# Altium PCB Gym_rep_counter.PcbDoc
Units mm, origin at the board's own origin, x right, y up, seen from the top; angles counter-clockwise.
Board outline 44.6 x 30.6 mm, 2 copper layers (Top Layer, Bottom Layer); 19 components, 19 nets, 90 pads, 14 vias.
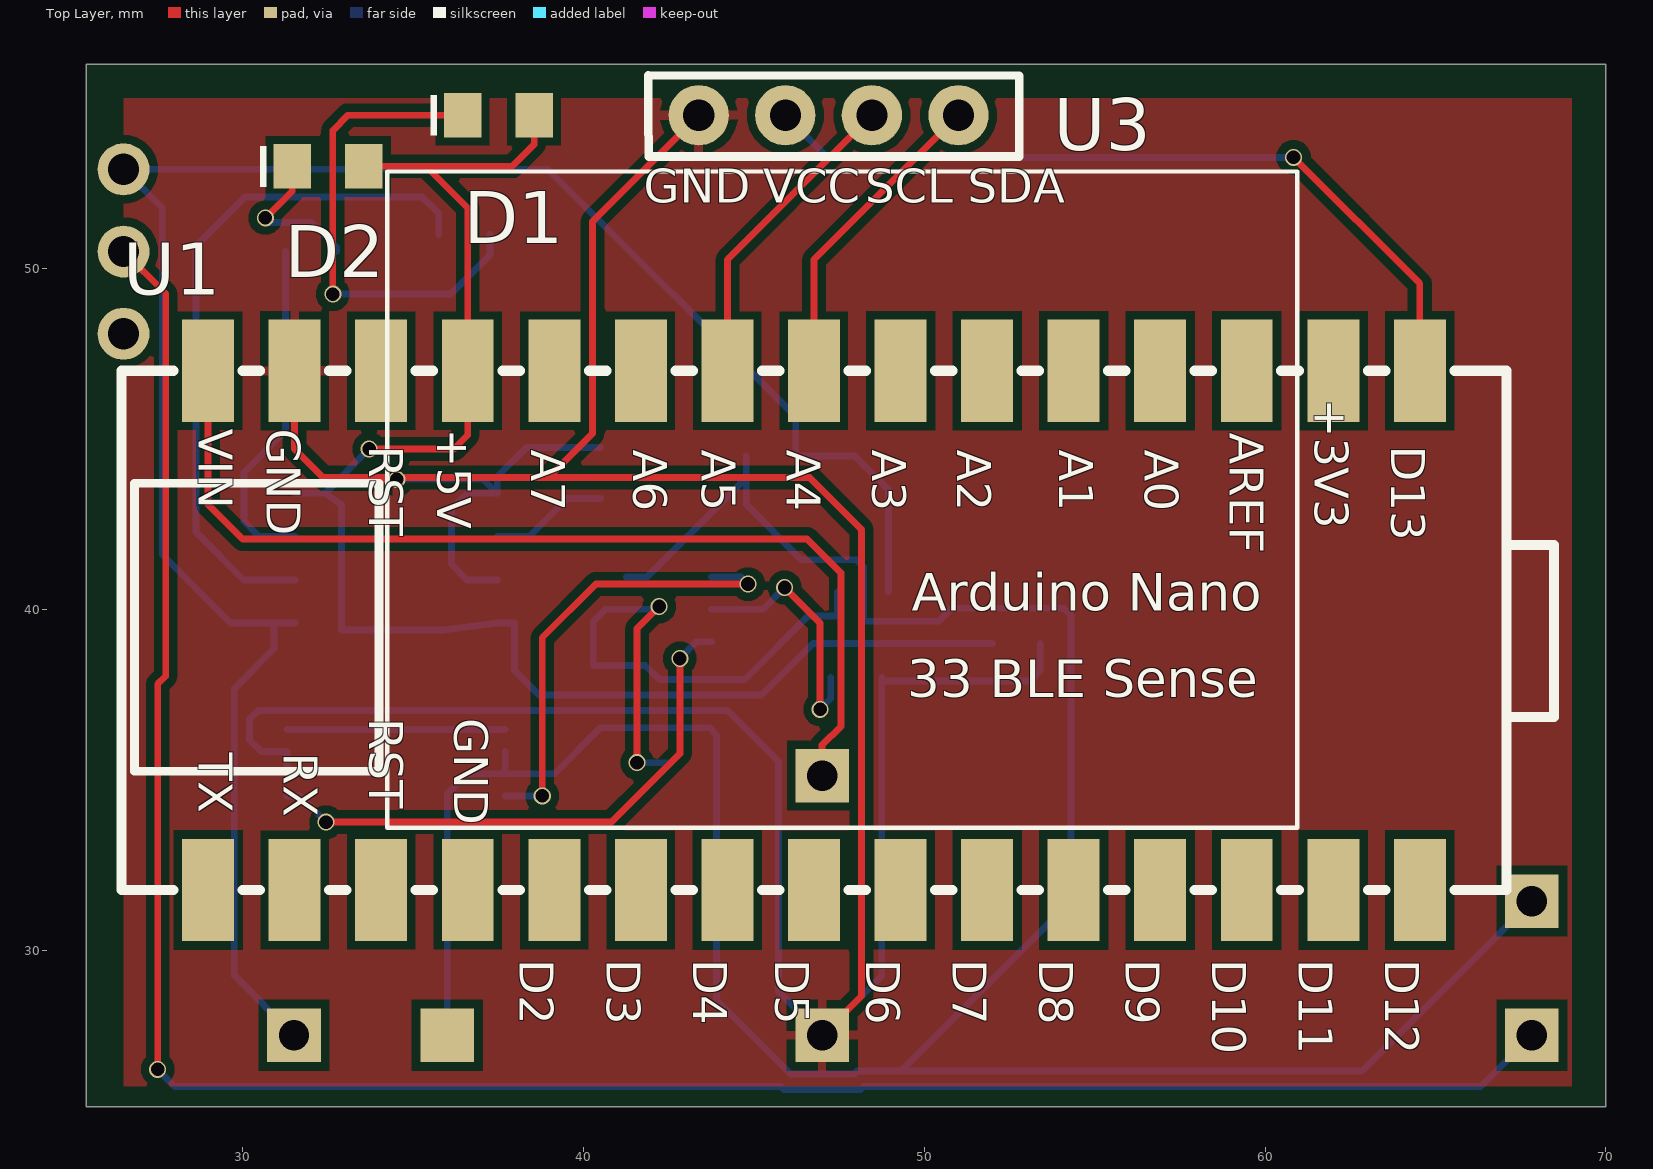
[diagram p0: Top Layer view]
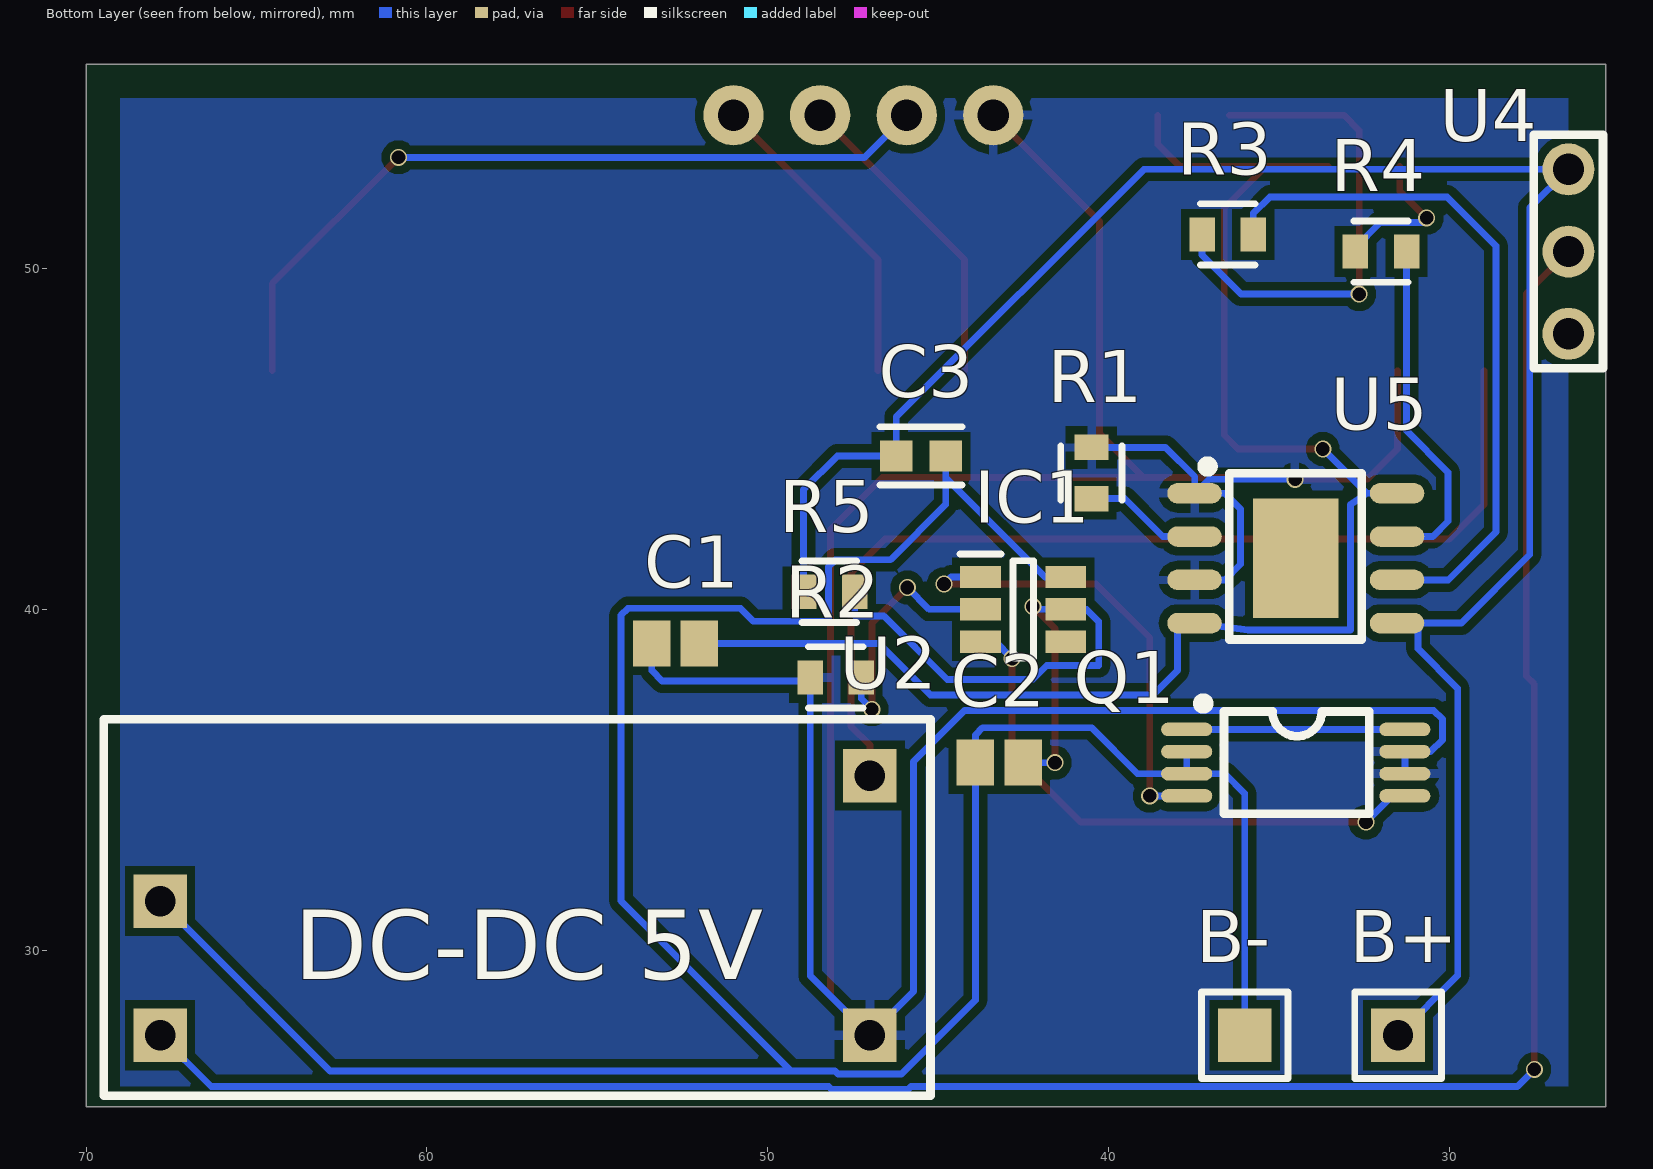
[diagram p1: Bottom Layer view, seen from below]

## Layer stack, top to bottom
Top Solder: solder mask 0.0102, Solder Resist, Dk 3.5
Top Layer: signal copper 0.0356
Dielectric 1: dielectric 0.32, FR-4, Dk 4.8
Bottom Layer: signal copper 0.0356
Bottom Solder: solder mask 0.0102, Solder Resist, Dk 3.5

## Board outline
25.4,25.4 70,25.4 70,56 25.4,56

## Design rules (kind name [scope] priority, off if disabled: settings)
Clearance [All] p1: gap=0.25 ignorepadtopadclearanceinfootprint=FALSE
PolygonConnect [All] p1: connectstyle=Relief reliefconductorwidth=0.254 reliefentries=4 polygonreliefangle="90 Angle" airgapwidth=0.254
RoutingVias [All] p1: holewidth=0.4 width=0.5 viastyle="Through Hole" minholewidth=0.4 minwidth=0.5 maxholewidth=0.4 maxwidth=0.5
SolderMaskExpansion [All] p1: expansion=0.102 istentingtop=FALSE
SupplyNets "Schematic Supply Nets" [InNet('GND')] p1: voltage=0.000
Width [All] p1: maxlimit=0.2 minlimit=0.1 preferedwidth=0.2
30 further rules are at their usual default settings.

## Components (designator, comment, footprint, x,y, rotation, side; value= is the part's Value field where it differs from the comment)
B+ "Header-Male-2.54_1x1" Battery_connector#1 31.5,27.5 r180 bottom
B- "Header-Male-2.54_1x1" Battery_connector#2 36,27.5 r180 bottom
C1 "100nF" CAPC2013X88X50LL20T25 52.7,39 r180 bottom
C2 "100nF" CAPC2013X88X50LL20T25 43.2,35.5 r180 bottom
C3 "10uF" FP-GRM188-0_1-e0_2_0_5-IPC_B 45.5,44.5 r180 bottom
D1 "green" WL-SMCW_0805_150080xx75000 37.5,54.5 r0 top
D2 "Red" WL-SMCW_0805_150080xx75000 32.5,53 r0 top
IC1 "DW01A-G" SOT95P280X135-6N 42.5,40 r180 bottom
Q1 "FS8205A" TSSOP-8_L4.4-W3.5-P0.65-LS6.4-BL 34.5,35.5 r270 bottom
R1 "1.2K" FP-CRCW0603-HPe3-MFG 40.5,44 r270 bottom
R2 "1K" FP-CRCW0603-HPe3-MFG 48,38 r180 bottom
R3 "1K" FP-CRCW0603-HPe3-MFG 36.5,51 r180 bottom
R4 "1K" FP-CRCW0603-HPe3-MFG 32,50.5 r180 bottom
R5 "100Ω" FP-CRCW0603-HPe3-MFG 48.193,40.515 r180 bottom
U1 "Arduino Nano 33 BLE Sense" arduino_nano_33 46.76,39.38 r270 top
U2 "Boost_Convertor" BOOST_CONVERTER 69.479,25.722 r180 bottom
U3 "OLED_display" OLED_DISPLAY 47.063,53.23 r0 top
U4 "Switch" SWITCH 26.5,52.913 r270 bottom
U5 "TP4056" TP4056 34.5,41.5 r180 bottom

## Footprints (in the part's own frame and the unit in brackets; to place one, negate y for a bottom-side part, rotate by r counter-clockwise, add the part's x,y. Pads: shape width x height; smd on the part's side, far side on the other; paste and mask are expansions set on the pad)
arduino_nano_33 [mil]
  rect 118.11x60 smd paste+0 mask+2: 1(-300,700) 2(-300,600) 3(-300,500) 4(-300,400) 5(-300,300) 6(-300,200) 7(-300,100) 8(-300,0) 9(-300,-100) 10(-300,-200) 11(-300,-300) 12(-300,-400) 13(-300,-500) 14(-300,-600) 15(-300,-700) 16(300,-700) 17(300,-600) 18(300,-500) 19(300,-400) 20(300,-300) 21(300,-200) 22(300,-100) 23(300,0) 24(300,100) 25(300,200) 26(300,300) 27(300,400) 28(300,500) 29(300,600) 30(300,700)
  silkscreen extent -300,-800 300,855
Battery_connector#1 [mil]
  rect 62x62 hole 35 paste-99999 mask+2: 1(0,0)
  silkscreen extent -50,-50 50,50
Battery_connector#2 [mil]
  rect 62x62 all layers, no hole paste-99999 mask+2: 1(0,0)
  silkscreen extent -50,-50 50,50
BOOST_CONVERTER [mil]
  rect 62x62 hole 35 paste-99999 mask+4: 1(65,225) 2(65,70) 3(885,370) 4(885,70)
  silkscreen extent 0,0 955,435
CAPC2013X88X50LL20T25 [mm] "Chip Capacitor, 2-Leads, Body 2.00x1.25mm, IPC High Density"
  rect 1.1x1.35 smd: 1(-0.7,0) 2(0.7,0)
  body extent -1.1,-0.72 1.1,0.72, height 0.88
FP-CRCW0603-HPe3-MFG [mm]
  rect 0.75x1 smd paste+0 mask+0: 1(-0.75,0) 2(0.75,0)
  silkscreen extent -0.8,-0.9 0.8,0.9, body extent -0.8,-0.43 0.8,0.43, height 0.55
FP-GRM188-0_1-e0_2_0_5-IPC_B [mm]
  rect 0.959x0.912 smd paste+0 mask+0: 1(-0.727,0) 2(0.727,0)
  silkscreen extent -1.21,-0.86 1.21,0.86, body extent -0.8,-0.4 0.8,0.4, height 0.9
OLED_DISPLAY [mil]
  round 69.69 hole 36 paste-99999 mask+4: 1(-145,50) 1(-145,50) 2(-45,50) 2(-45,50) 3(55,50) 3(55,50) 4(155,50) 4(155,50)
  silkscreen extent -505,-773 546,96
SOT95P280X135-6N [mm]
  rect 1.2x0.65 smd: 1(-1.25,0.95) 2(-1.25,0) 3(-1.25,-0.95) 4(1.25,-0.95) 5(1.25,0) 6(1.25,0.95)
  silkscreen extent -1.85,-1.43 0.3,1.63
SWITCH [mil]
  round 60 hole 36 paste-99999 mask+2: 1(0,0) 2(95,0) 3(190,0)
  silkscreen extent -40,-40 230,40
TP4056 [mm]
  oval 1.6x0.6 smd paste+0 mask+0.051: 1(-2.972,1.905) 2(-2.972,0.635) 3(-2.972,-0.635) 4(-2.972,-1.905) 5(2.972,-1.905) 6(2.972,-0.635) 7(2.972,0.635) 8(2.972,1.905)
  rect 2.5x3.5 smd paste+0 mask+0.051: 9(0,0)
  silkscreen extent -2.74,-2.39 1.93,2.84
TSSOP-8_L4.4-W3.5-P0.65-LS6.4-BL [mm]
  oval 0.4x1.5 smd paste+0 mask+0.051: 1(-0.975,-3.2) 2(-0.325,-3.2) 3(0.325,-3.2) 4(0.975,-3.2) 5(0.975,3.2) 6(0.325,3.2) 7(-0.325,3.2) 8(-0.975,3.2)
  silkscreen extent -1.89,-2.87 1.5,2.16
WL-SMCW_0805_150080xx75000 [mm] "SMD Mono-color Chip LED, body 2.0x1.25mm"
  rect 1.1x1.3 smd: 1(-1.05,0) 2(1.05,0)
  silkscreen extent -2,-0.6 -1.8,0.6, body extent -1,-0.63 1,0.62, height 0.7

## Part data
B+ B-: library part Battery_Connector, Manufacturer=ReliaPro, Manufacturer Part=Header-Male-2.54_1x1, spicePre=P, Supplier=LCSC, Supplier Part=C81276
C1 C2: library part CMP-2007-00266-1, Manufacturer=Kemet, Part Number=C0805C103K5RACTU
C3: library part CMP-2006-02860-2, "Chip Multilayer Ceramic Capacitors for General Purpose, 0603, 0.47uF, X7R, 15%, 10%, 16V", Capacitance=470nF, Case Code (Imperial)=0603, Case Code (Metric)=1608, Dielectric=X7R, Max Operating Temperature=125°C, Min Operating Temperature=-55°C, Package Quantity=1, Tolerance=10%, Voltage=16V, Case/Package=0603, Depth=0.8mm, Height=0.8mm, Lead Free="Lead Free", Length=1.6mm, Material=Ceramic, Mount="Surface Mount", Number of Pins=2, Packaging="Tape and Reel", REACH SVHC="No SVHC", Termination=SMD/SMT, Thickness=0.035inch, Voltage Rating=16V, Voltage Rating (DC)=16V, Width=0.8mm
D1: library part CMP-1426-00011-3, "LED Uni-Color Red 630nm 2-Pin Chip 0805(2012Metric) T/R", Case Code (Imperial)=0805, Case Code (Metric)=2012, Color=Red, Forward Current=100mA, Forward Voltage=2V, Max Junction Temperature (Tj)=95°C, Max Operating Temperature=85°C, Max Reverse Voltage (DC)=5V, Min Operating Temperature=-40°C, Power Dissipation=72mW, Test Current=20mA, Case/Package=0805, Dominant Wavelength=625nm, Height=700µm, Length=2mm, Lens Style="Clear, Rectangular", Luminous Intensity=150mcd, Mount="Surface Mount", Packaging="Tape and Reel", Peak Wavelength=630nm, REACH SVHC=Unknown, RoHS=Compliant, Viewing Angle=140°, Wavelength=625nm, Width=1.25mm
D2: library part CMP-1426-00011-3, "LED Uni-Color Red 630nm 2-Pin Chip 0805(2012Metric) T/R", Case Code (Imperial)=0805, Case Code (Metric)=2012, Forward Current=100mA, Forward Voltage=2V, Max Junction Temperature (Tj)=95°C, Max Operating Temperature=85°C, Max Reverse Voltage (DC)=5V, Min Operating Temperature=-40°C, Power Dissipation=72mW, Test Current=20mA, Case/Package=0805, Color=Red, Dominant Wavelength=625nm, Height=700µm, Length=2mm, Lens Style="Clear, Rectangular", Luminous Intensity=150mcd, Mount="Surface Mount", Packaging="Tape and Reel", Peak Wavelength=630nm, REACH SVHC=Unknown, RoHS=Compliant, Viewing Angle=140°, Wavelength=625nm, Width=1.25mm
IC1: "One Cell Lithium-ion/Polymer Battery Protection IC", Package=None, Check_prices=https://www.snapeda.com/parts/DW01A-G/Fortune+Semiconductor/view-part/?ref=eda, MF=Fortune, MP=DW01A-G, SnapEDA_Link=https://www.snapeda.com/parts/DW01A-G/Fortune+Semiconductor/view-part/?ref=snap
Q1: LCSC Assembly=Yes, Manufacturer=FORTUNE, image=//image.lceda.cn/szlcsc/C16052.jpg, Manufacturer Part=FS8205A, SMT Type=Basic, spicePre=Q, spiceSymbolName=FS8205A, Supplier=LCSC, Supplier Part=C16052
R1 R2 R3 R4 R5: library part CMP-2000-02970-2, "RES Thick Film, 1kΩ, 1%, 0.33W, 100ppm/°C, 0603", Case Code (Imperial)=0603, Case Code (Metric)=1608, Max Operating Temperature=155°C, Max Power Dissipation=250mW, Min Operating Temperature=-55°C, Package Quantity=10, Resistance=1kR, Temperature Coefficient=100ppm/°C, Tolerance=1%, Voltage Rating=75V, Case/Package=0603, Composition="Thick Film", Contact Plating=Tin, Depth=0.85mm, Features="Automotive AEC-Q200", Height=0.45mm, Lead Free="Lead Free", Length=1.6mm, Military Standard=Not, Mount="Surface Mount", Number of Pins=2, Number of Terminations=2, Packaging="Tape and Reel", Power Rating=250mW, Radiation Hardening=No, Termination=SMD/SMT, Voltage Rating (DC)=75V, Weight=7.1E-05oz, Width=0.8mm
U1: library part arduino_nano_33, Manufacturer=Arduino, Manufacturer Part="Barcode: 7630049201507", Contributor=RedCoal, Datasheet=https://docs.arduino.cc/resources/datasheets/ABX00031-datasheet.pdf?_gl=1*1n6zooy*_ga*NzA1NzIyOTE4LjE2MzUzMjI4MjI.*_ga_NEXN8H46L5*MTY0MjgyNzE0Ni40LjEuMTY0MjgyNzE2Ny4w, link=https://store-usa.arduino.cc/products/arduino-nano-33-ble-sense?selectedStore=us, spicePre=U, spiceSymbolName="Arduino Nano 33 BLE Sense", Supplier="Arduino store", Supplier Part=ABX00031
U5: LCSC Assembly=Yes, Manufacturer=TOPPOWER, Contributor=Guest, image=//image.lceda.cn/szlcsc/C16581.jpg, Manufacturer Part=TP4056, spicePre=U, Supplier=LCSC, Supplier Part=C16581
U2: Contributor="Shyam Ravi", spicePre=U, spiceSymbolName=Boost_Convertor
U3: Contributor=shyamganeshravi2003, spicePre=U, spiceSymbolName=OLED_display
U4: Contributor="Shyam Ravi", spicePre=U, spiceSymbolName=Switch

## Via types
v1: diameter 0.5, hole 0.4, Top Layer to Bottom Layer, 14 vias

## Nets (pads, with @x,y where several pads share a name; then routed paths per layer and width w, separated by ;. In a path a pad name is that pad's centre, name@x,y a point inside that pad or via, vN(x,y) a via of type N, cw(c..) or ccw(c..) an arc to the next point about the centre after c; other vN are vias at no path point)
3V3: U1.1 U3.2 | length 23.2
  Top Layer w0.2: v1(60.833,53.264) 64.54,49.557 U1.1
  Bottom Layer w0.2: U3.2@45.92,54.5 47.156,53.264 v1(60.833,53.264)
5V: U1.15 U2.3 | length 29.5
  Top Layer w0.2: U1.15 28.98,43.078 29.996,42.062 46.558,42.062 47.549,41.072 47.549,36.566 47,36.017 U2.3
B+: U2.2 U4.2 | length 65.8
  Top Layer w0.2: U4.2 27.737,49.263 27.737,38.041 27.5,37.804 v1(27.5,26.5)
  Bottom Layer w0.2: v1(27.5,26.5) 28,26 45.794,26 45.881,25.913 48.119,25.913 48.206,26 66.328,26 U2.2
B-: B-.1 C2.1 C3.2 IC1.6 Q1.2 Q1.3 U2.1 | length 85
  Bottom Layer w0.2: B-.1 36,34.599 36.576,35.175 Q1.3 ; Q1.2 Q1.3 ; IC1.6 41.859,40.95 44.773,43.864 ; C3.2 44.773,43.864 ; U2.1 62.841,26.45 49.31,26.45 ; Q1.3 39.141,35.175 40.492,36.525 43.688,36.525 43.9,36.313 C2.1 43.9,28.53 46.068,26.363 47.932,26.363 48.02,26.45 49.31,26.45 ; 44.773,43.864 44.773,43.078 46.399,41.453 48.006,41.453 48.209,41.25 48.209,39.649 50.419,39.649 50.8,40.03 54.102,40.03 54.305,39.827 54.305,31.445 49.31,26.45
GND: C1.1 Q1.6 Q1.7 R1.1 R2.1 U1.14 U2.4 U3.1 U5.1 U5.3 | length 105.7
  Top Layer w0.2: U1.14 31.52,44.704 32.358,43.866 ; v1(34.519,43.815) 32.409,43.815 32.358,43.866 ; U3.1@43.38,54.5 40.259,51.379 40.259,45.161 38.964,43.866 ; U2.4 48.158,28.658 48.158,42.342 46.634,43.866 38.964,43.866 ; 32.358,43.866 34.519,43.866 38.964,43.866
  Bottom Layer w0.2: Q1.6 Q1.7 30.544,35.825 30.2,36.17 30.2,36.779 30.454,37.033 44.221,37.033 45.72,35.535 45.72,28.78 U2.4 48.75,29.25 R2.1@48.75,37.897 ; v1(34.519,43.815) 37.055,43.815 U5.1@37.465,43.405 ; U5.3 36.576,40.865 36.119,41.322 36.119,42.948 36.576,43.405 U5.1@37.465,43.405 ; U5.1 U5.1@37.465,43.405 ; R1.1 38.324,44.75 37.465,43.891 U5.1@37.465,43.405 ; R2.1 R2.1@48.75,37.897 ; C1.1 53.4,38.202 53.095,37.897 R2.1@48.75,37.897
NetB+_1: B+.1 C3.1 R5.1 U4.1 U5.5 | length 59.8
  Bottom Layer w0.2: B+.1 29.75,29.25 29.75,37.681 30.912,38.844 U5.5@30.912,39.595 ; U5.5 U5.5@30.912,39.595 ; R5.1 48.943,43.512 47.955,44.5 C3.1 46.227,45.644 38.958,52.913 U4.1 27.635,51.778 27.635,41.602 29.642,39.595 U5.5@30.912,39.595
NetC2_2: C2.2 IC1.5 R5.2 | length 18
  Top Layer w0.2: v1(41.568,35.5) 41.568,39.434 v1(42.215,40.081)
  Bottom Layer w0.2: v1(41.568,35.5) C2.2 ; v1(42.215,40.081) 42.134,40 IC1.5 40.64,40 40.284,39.644 40.284,38.354 41.809,38.354 42.224,37.939 44.728,37.939 46.591,39.802 47.443,39.802 R5.2
NetD1_1: D1.1 R3.1 | length 14.5
  Top Layer w0.2: v1(32.639,49.251) 32.639,54.051 33.088,54.5 D1.1
  Bottom Layer w0.2: v1(32.639,49.251) 36.107,49.251 37.25,50.394 R3.1
NetD2_1: D2.1 R4.1 | length 4.5
  Top Layer w0.2: v1(30.658,51.486) 31.45,52.278 D2.1
  Bottom Layer w0.2: v1(30.658,51.486) 30.658,51.35 32.022,51.35 32.75,50.622 R4.1
NetIC1_1: IC1.1 Q1.4 | length 13.6
  Top Layer w0.2: v1(38.786,34.525) 38.786,39.167 40.361,40.742 v1(44.826,40.742)
  Bottom Layer w0.2: Q1.4 v1(38.786,34.525) ; IC1.1 44.617,40.95 v1(44.826,40.742)
NetIC1_2: IC1.2 R2.2 | length 7.5
  Top Layer w0.2: v1(45.898,40.64) 46.939,39.599 v1(46.939,37.065)
  Bottom Layer w0.2: IC1.2 45.258,40 v1(45.898,40.64) ; v1(46.939,37.065) 47.25,37.375 R2.2
NetIC1_3: IC1.3 Q1.5 | length 16.6
  Top Layer w0.2: v1(32.442,33.757) 40.818,33.757 42.824,35.763 v1(42.824,38.557)
  Bottom Layer w0.2: Q1.5 31.674,34.525 v1(32.442,33.757) ; v1(42.824,38.557) 43.317,39.05 IC1.3
NetQ1_1: Q1.1 Q1.8 | length 6.4
  Bottom Layer w0.2: Q1.8 Q1.1
NetR1_2: R1.2 U5.2 | length 3.5
  Bottom Layer w0.2: U5.2 38.405,42.135 39.52,43.25 R1.2
NetR3_2: R3.2 U5.6 | length 20.4
  Bottom Layer w0.2: U5.6 30.026,40.865 28.626,42.266 28.626,50.668 30.058,52.1 35.263,52.1 35.75,51.613 R3.2
NetR4_2: R4.2 U5.7 | length 10.1
  Bottom Layer w0.2: R4.2 31.25,45.242 30.03,44.022 30.03,42.585 30.48,42.135 U5.7
SCL: U1.9 U3.3 | length 9.3
  Top Layer w0.2: U1.9 44.22,50.26 U3.3@48.46,54.5
SDA: U1.8 U3.4 | length 9.3
  Top Layer w0.2: U1.8 46.76,50.26 U3.4@51,54.5
VCCUSB: C1.2 D1.2 D2.2 U1.12 U5.4 U5.8 | length 46
  Top Layer w0.2: D2.2 35.382,53 ; v1(33.706,44.704) 36.194,44.704 36.6,45.11 U1.12 36.6,51.782 35.382,53 ; D1.2 38.55,53.645 37.905,53 35.382,53
  Bottom Layer w0.2: U5.8 32.407,43.405 ; v1(33.706,44.704) 32.407,43.405 ; C1.2 46.736,39 45.225,37.489 38.685,37.489 37.973,38.202 37.973,39.595 U5.4 35.894,39.395 32.893,39.395 32.893,43.078 32.407,43.405
pads on no net: IC1.4 U1.2 U1.3 U1.4 U1.5 U1.6 U1.7 U1.10 U1.11 U1.13 U1.16 U1.17 U1.18 U1.19 U1.20 U1.21 U1.22 U1.23 U1.24 U1.25 U1.26 U1.27 U1.28 U1.29 U1.30 U4.3 U5.9

## Polygon pours and split planes (outlines as drawn)
GND on Bottom Layer "GND_L02_P000" (solid, pour order 0): 26.5,55 26.5,26 69,26 69,55
GND on Top Layer "GND_L01_P001" (solid, pour order 1): 26.5,55 26.5,26 69,26 69,55

## Text inside footprints (layer, text, board x,y; h text height)
U1: Top Overlay "D13" at 63.703,44.797 h1 r270; Top Overlay "+3V3" at 61.463,46.177 h1 r270; Top Overlay "AREF" at 58.963,45.177 h1 r270; Top Overlay "A0" at 56.463,44.677 h1 r270; Top Overlay "A1" at 53.963,44.677 h1 r270; Top Overlay "A2" at 50.963,44.677 h1 r270; Top Overlay "A3" at 48.463,44.677 h1 r270; Top Overlay "A4" at 45.963,44.677 h1 r270; Top Overlay "A5" at 43.463,44.677 h1 r270; Top Overlay "A6" at 41.463,44.677 h1 r270; Top Overlay "A7" at 38.463,44.677 h1 r270; Top Overlay "+5V" at 35.703,45.297 h1 r270; Top Overlay "RST" at 33.703,44.797 h1 r270; Top Overlay "GND" at 30.703,45.297 h1 r270; Top Overlay "VIN" at 28.703,45.297 h1 r270; Top Overlay "TX" at 28.703,35.797 h1 r270; Top Overlay "RX" at 31.203,35.797 h1 r270; Top Overlay "RST" at 33.703,36.797 h1 r270; Top Overlay "GND" at 36.203,36.797 h1 r270; Top Overlay "D2" at 38.132,29.728 h1 r270; Top Overlay "D3" at 40.672,29.728 h1 r270; Top Overlay "D4" at 43.212,29.728 h1 r270; Top Overlay "D5" at 45.625,29.728 h1 r270; Top Overlay "D6" at 48.292,29.728 h1 r270; Top Overlay "D7" at 50.832,29.728 h1 r270; Top Overlay "D8" at 53.372,29.728 h1 r270; Top Overlay "D9" at 55.912,29.728 h1 r270; Top Overlay "D10" at 58.452,29.728 h1 r270; Top Overlay "D11" at 60.992,29.728 h1 r270; Top Overlay "D12" at 63.532,29.728 h1 r270; Top Overlay "Arduino Nano" at 49.63,39.964 h1.1; Top Overlay "33 BLE Sense" at 49.503,37.424 h1.1
U2: Bottom Overlay "DC-DC 5V" at 63.891,29.151 h2.03
U3: Top Overlay "GND" at 41.766,51.933 h1; Top Overlay "VCC" at 45.266,51.933 h1; Top Overlay "SCL" at 48.266,51.933 h1; Top Overlay "SDA" at 51.266,51.933 h1